# Altium PCB LoRa-Alarm.PcbDoc
Units mil, origin at the board's own origin, x right, y up, seen from the top; angles counter-clockwise.
Board outline 2372.23 x 1430.02 mil, 2 copper layers (Top Layer, Bottom Layer); 52 components, 40 nets, 227 pads, 37 vias.
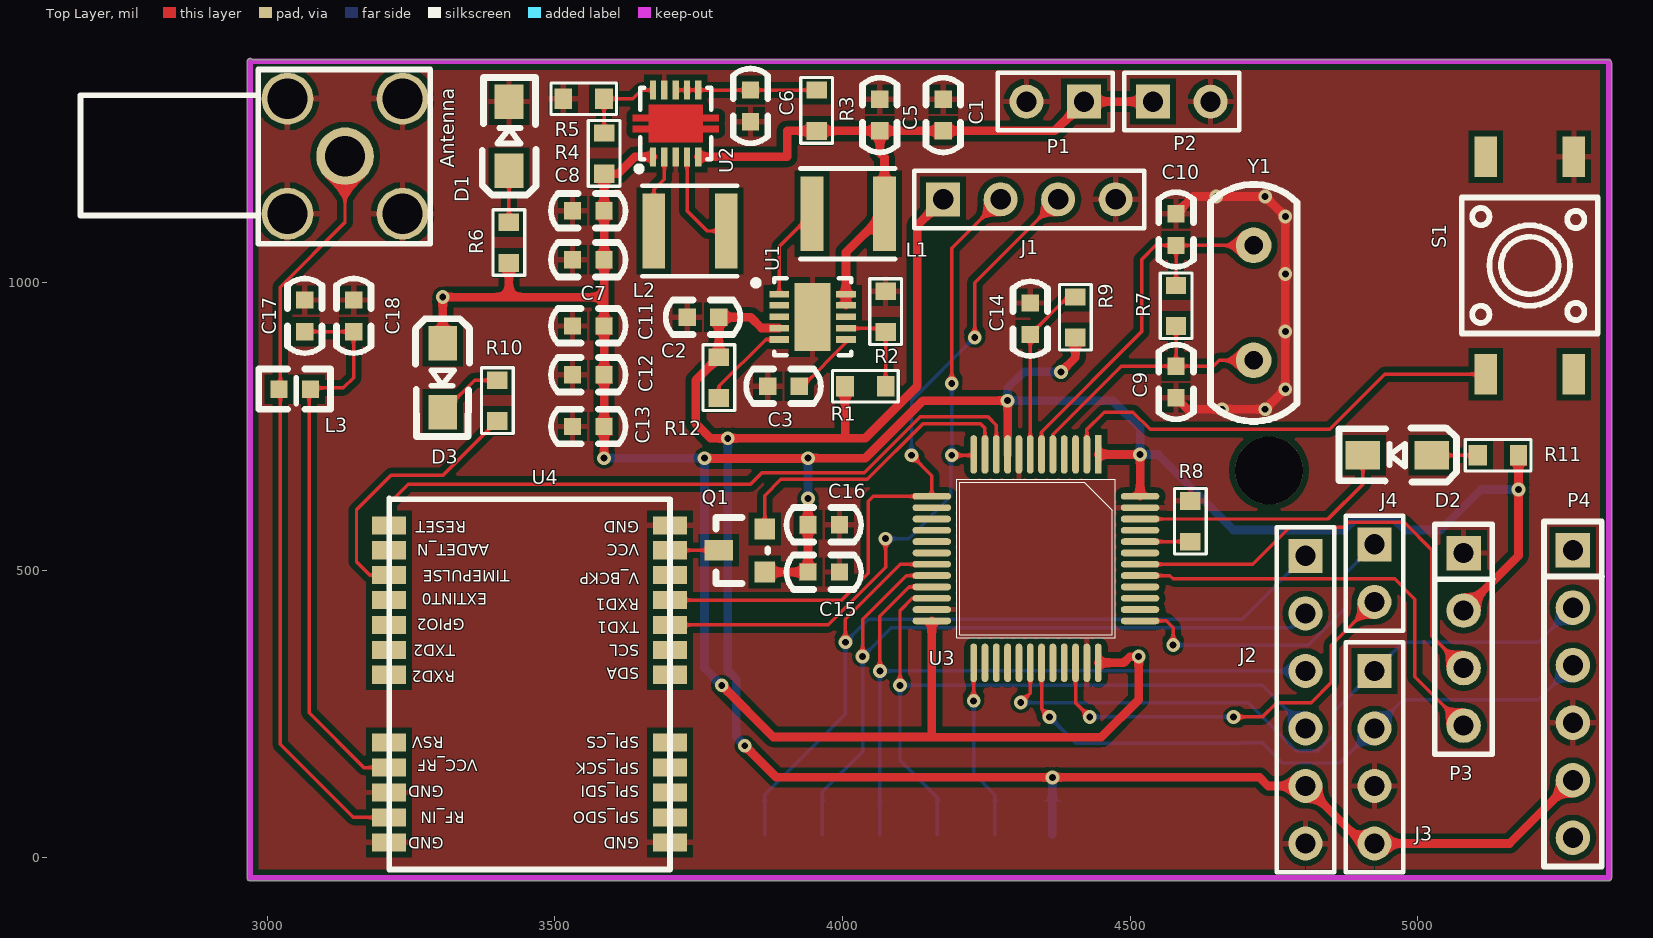
[diagram p0: Top Layer view]
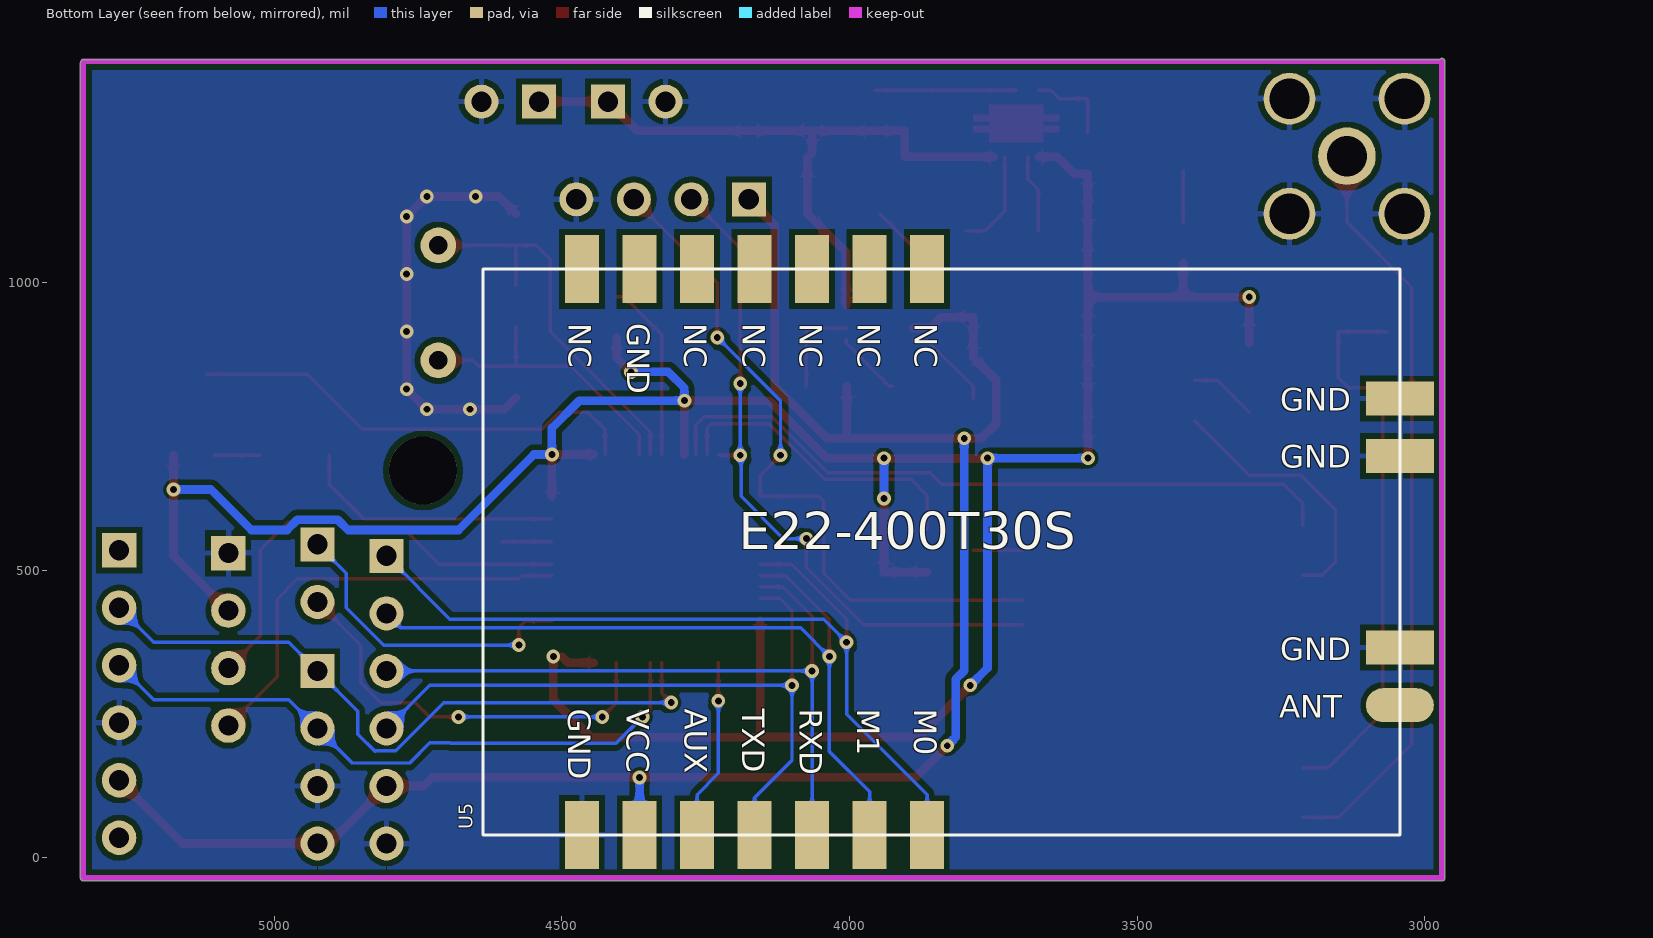
[diagram p1: Bottom Layer view, seen from below]

## Layer stack, top to bottom
Top Solder: solder mask 0.4, Solder Resist, Dk 3.5
Top Layer: signal copper 1.4
Dielectric 1: dielectric 12.6, FR-4, Dk 4.8
Bottom Layer: signal copper 1.4
Bottom Solder: solder mask 0.4, Solder Resist, Dk 3.5

## Board outline
2970,-40.01 cw(c2970,-35) 2964.99,-35 2964.99,1385 cw(c2970,1385) 2974.44,1387.34 5332.2,1387.34 cw(c5332.2,1382.32) 5337.22,1382.32 5337.22,-35 cw(c5332.2,-35) 5332.2,-40.01

## Design rules (kind name [scope] priority, off if disabled: settings)
Clearance clearance [IsVia vs InPolygon] p1: gap=6
Clearance poly [InPolygon] p2: gap=10
Clearance all [All] p3: gap=6
MinimumSolderMaskSliver [All] p1: minsoldermaskwidth=2
PolygonConnect PolygonConnect_1 [IsVia] p1: connectstyle=Direct reliefconductorwidth=10 reliefentries=4 polygonreliefangle="90 Angle" airgapwidth=10
PolygonConnect [All] p2: connectstyle=Relief reliefconductorwidth=10 reliefentries=4 polygonreliefangle="90 Angle" airgapwidth=10
RoutingVias [All] p1: holewidth=12 width=24 viastyle="Through Hole" minholewidth=12 minwidth=24 maxholewidth=12 maxwidth=24
SilkToSilkClearance [All] p1: silktosilkclearance=2
SilkToSolderMaskClearance [IsPad] p1: minsilkscreentomaskgap=2 clearancetoexposedcopper=TRUE
SolderMaskExpansion [All] p1: expansion=2.5
Width Width_1 [InNetClass('PWR')] p1: maxlimit=60 minlimit=8 preferedwidth=15
Width [All] p2: maxlimit=6 minlimit=6 preferedwidth=6
27 further rules are at their usual default settings.

## Classes and differential pairs
component class LoRa-Alarm: ANTENNA
net class PWR: +3.3V +3.7V +5V GND

## Components (designator, comment, footprint, x,y, rotation, side; value= is the part's Value field where it differs from the comment)
Antenna "Active antenna" SMA-W 3135,1220 r0 top (schematic designator ANTENNA)
C1 "Cap1" 0603C 4175,1314.13 r270 top
C2 "Cap2" 0603C 3735,940 r0 top
C3 "Cap3" 0603C 3875,820 r0 top
C5 "Cap5" 0603C 4065,1314.13 r270 top
C6 "Cap6" 0603C 3840,1285 r90 top
C7 "Cap7" 0603C 3535.43,1040 r0 top
C8 "Cap8" 0603C 3535.43,1125 r0 top
C9 "Cap9" 0603C 4580,850 r270 top
C10 "Cap10" 0603C 4580,1070 r90 top
C11 "Cap11" 0603C 3580.43,925 r180 top
C12 "Cap12" 0603C 3580.43,840 r180 top
C13 "Cap13" 0603C 3580.43,750 r180 top
C14 "Cap14" 0603C 4326.5,915 r90 top
C15 "Cap15" 0603C 3945,496.92 r0 top
C16 "Cap16" 0603C 3945,579.04 r0 top
C17 "Cap17" 0603C 3065,920 r90 top
C18 "Cap18" 0603C 3150,920 r90 top
D1 "LED1" 贴片二极管 3420,1315 r270 top
D2 "LED2" 贴片二极管 4905,700 r0 top
D3 "LED3" 贴片二极管 3305,775 r90 top
J1 "GPS" HDR1X4 4175,1145 r0 top
J2 "Lora" HDR1X6 4805,525 r270 top
J3 "Bluetooth" HDR1X4 4925,325 r270 top
J4 "JTAG" HDR1X2 4925,545 r270 top
L1 "Inductor1" IND-SMD_L4.0-W4.0_SMNR4020 4010,1120 r180 top
L2 "Inductor2" IND-SMD_L4.0-W4.0_SMNR4020 3735,1090 r180 top
L3 "Inductor3" 0603L 3070,815 r180 top
P1 "Header 2" HDR1X2 4420,1315 r180 top
P2 "Header 2" HDR1X2 4540,1315 r0 top
P3 "OLED" SIP4 5080,530 r270 top
P4 "Bluetooth" SIP6 5270,535 r270 top
Q1 "SI2302" SOT-23 3865,496.92 r90 top
R1 "Res1" 0603R 4040,820 r180 top
R2 "Res2" 0603R 4075,950 r270 top
R3 "Res3" 0603R 3955,1299.57 r270 top
R4 "Res4" 0603R 3585.43,1225 r270 top
R5 "Res5" 0603R 3550,1320 r0 top
R6 "Res6" 0603R 3420,1070 r270 top
R7 "Res7" 0603R 4580,960 r270 top
R8 "Res8" 0603R 4605,585.32 r90 top
R9 "Res9" 0603R 4405,940 r270 top
R10 "Res10" 0603R 3400,795 r270 top
R11 "Res11" 0603R 5140,700 r180 top
R12 "Res12" 0603R 3785,835 r270 top
S1 "按键" KEY-SMD_4P-L6.0-W6.0-P3.90-LS10.0 5195,1030 r90 top
U1 "TPS61230" VSON-10_L3.0-W3.0-P0.50-BL-EP 3947.97,940.62 r270 top
U2 "TPS63000" SON-10_L3.1-W3.1-P0.50-BL-EP 3710,1276.93 r0 top
U3 "STM32L151" TQFP48 4335,525 r270 top
U4 "UM220-III N" "UM220-III N" 3211.81,625.47 r180 top
U5 "E22-400T30S" PE32(915T30S) 3865,40 r180 bottom
Y1 "8MHz" XTAL 4715,1070 r270 top

## Footprints (in the part's own frame and the unit in brackets; to place one, negate y for a bottom-side part, rotate by r counter-clockwise, add the part's x,y. Pads: shape width x height; smd on the part's side, far side on the other; paste and mask are expansions set on the pad)
0603C [mil]
  rect 30x30 smd: 1(-5,0) 2(50,0)
  silkscreen extent -42,-30 87,30
0603L [mil]
  rect 30x30 smd: 1(-5,0) 2(50,0)
  silkscreen extent -40,-35 85,35
0603R [mm]
  rect 0.762x0.9 smd: 1(-0.9,0)
  rect 0.8x0.9 smd: 2(0.9,0)
  silkscreen extent -1.45,-0.7 1.45,0.7, body extent -0.85,-0.4 0.85,0.4, height 0.56
HDR1X2 [mm] "Connector; Header; 2 Position"
  rect 1.5x1.5 hole 0.9: 1(0,0)
  round 1.5 hole 0.9: 2(2.54,0)
  silkscreen extent -1.27,-1.27 3.81,1.27
HDR1X4 [mm] "Connector; Header; 4 Position"
  rect 1.5x1.5 hole 0.9: 1(0,0)
  round 1.5 hole 0.9: 2(2.54,0) 3(5.08,0) 4(7.62,0)
  silkscreen extent -1.27,-1.27 8.89,1.27
HDR1X6 [mm] "Connector; Header; 6 Position"
  rect 1.5x1.5 hole 0.9: 1(0,0)
  round 1.5 hole 0.9: 2(2.54,0) 3(5.08,0) 4(7.62,0) 5(10.16,0) 6(12.7,0)
  silkscreen extent -1.27,-1.27 13.97,1.27
IND-SMD_L4.0-W4.0_SMNR4020 [mm]
  rect 1x3.3 smd: 1(-1.6,0) 2(1.6,0)
  silkscreen extent -2.08,-2 2.12,2
KEY-SMD_4P-L6.0-W6.0-P3.90-LS10.0 [mm]
  rect 1.8x1 smd: 1(-4.8,1.95) 2(4.8,1.95) 3(-4.8,-1.95) 4(4.8,-1.95)
  silkscreen extent -3,-3 3,3
PE32(915T30S) [mm] "40.5mm*25mm*3.80mm-S"
  rect 1.5x3 smd: 1(0,0) 2(-2.54,0) 3(-5.08,0) 4(-7.62,0) 5(-10.16,0) 6(-12.7,0) 7(-15.24,0) 8(-15.24,25) 9(-12.7,25) 10(-10.16,25) 11(-7.62,25) 12(-5.08,25) 13(-2.54,25) 14(0,25)
  rect 3x1.5 smd: 15(20.88,19.27) 16(20.88,16.73) 17(20.88,8.27)
  oval 3x1.5 smd: 18(20.88,5.73)
  silkscreen extent -19.62,0 20.88,25
SIP4 [mil]
  rect 60x60 hole 35: 1(0,0)
  round 60 hole 35: 2(100,0) 3(200,0) 4(300,0)
  silkscreen extent -50,-50 350,51
SIP6 [mil]
  rect 60x60 hole 35: 1(0,0)
  round 60 hole 35: 2(100,0) 3(200,0) 4(300,0) 5(400,0) 6(500,0)
  silkscreen extent -50,-50 550,51
SMA-W [mil]
  round 100 hole 70: 1(0,0)
  round 90 hole 70: 2(-100,-100) 2(-100,100) 2(100,-100) 2(100,100)
  silkscreen extent -460,-152 148,151, body extent -460,-140 135,136, height 108
SON-10_L3.1-W3.1-P0.50-BL-EP [mm]
  rect 0.28x0.85 smd: 1(-1,-1.475) 2(-0.5,-1.475) 3(0,-1.475) 4(0.5,-1.475) 5(1,-1.475) 6(1,1.475) 7(0.5,1.475) 8(0,1.475) 9(-0.5,1.475) 10(-1,1.475)
  round 0 smd: 11(0,0)
  Top Layer region: 1.199,0.826 1.199,0.39 1.9,0.39 1.9,0.11 1.199,0.11 1.199,-0.11 1.9,-0.11 1.9,-0.39 1.199,-0.39 1.199,-0.826 -1.199,-0.826 -1.199,-0.39 -1.9,-0.39 -1.9,-0.11 -1.199,-0.11 -1.199,0.11 -1.9,0.11 -1.9,0.39 -1.199,0.39 -1.199,0.826
  silkscreen extent -1.74,-2.12 1.58,1.58
SOT-23 [mil]
  rect 36x36 smd: 1(0,0) 2(75,0)
  rect 36x50 smd: 3(38,80)
  silkscreen extent -20,-5 95,85
TQFP48 [mm]
  rect 1.7x0.3 smd: 1(-4.482,2.784)
  oval 1.7x0.3 smd: 2(-4.482,2.284) 3(-4.482,1.784) 4(-4.482,1.284) 5(-4.482,0.784) 6(-4.482,0.284) 7(-4.482,-0.216) 8(-4.482,-0.716) 9(-4.482,-1.216) 10(-4.482,-1.716) 11(-4.482,-2.216) 12(-4.482,-2.716) 25(4.718,-2.716) 26(4.718,-2.216) 27(4.718,-1.716) 28(4.718,-1.216) 29(4.718,-0.716) 30(4.718,-0.216) 31(4.718,0.284) 32(4.718,0.784) 33(4.718,1.284) 34(4.718,1.784) 35(4.718,2.284) 36(4.718,2.784)
  oval 0.3x1.7 smd: 13(-2.632,-4.566) 14(-2.132,-4.566) 15(-1.632,-4.566) 16(-1.132,-4.566) 17(-0.632,-4.566) 18(-0.132,-4.566) 19(0.368,-4.566) 20(0.868,-4.566) 21(1.368,-4.566) 22(1.868,-4.566) 23(2.368,-4.566) 24(2.868,-4.566) 37(2.868,4.634) 38(2.368,4.634) 39(1.868,4.634) 40(1.368,4.634) 41(0.868,4.634) 42(0.368,4.634) 43(-0.132,4.634) 44(-0.632,4.634) 45(-1.132,4.634) 46(-1.632,4.634) 47(-2.132,4.634) 48(-2.632,4.634)
  silkscreen extent -3.38,-3.47 3.62,3.53
"UM220-III N" [mm]
  rect 1.5x0.8 smd: 1(0,1.2) 2(0,2.3) 3(0,3.4) 4(0,4.5) 5(0,5.6) 6(0,6.7) 7(0,7.8) 8(0,10.8) 9(0,11.9) 10(0,13) 11(0,14.1) 12(0,15.2) 13(-12.4,15.2) 14(-12.4,14.1) 15(-12.4,13) 16(-12.4,11.9) 17(-12.4,10.8) 18(-12.4,7.8) 19(-12.4,6.7) 20(-12.4,5.6) 21(-12.4,4.5) 22(-12.4,3.4) 23(-12.4,2.3) 24(-12.4,1.2)
  silkscreen extent -12.4,0 0,16.4
VSON-10_L3.0-W3.0-P0.50-BL-EP [mil]
  rect 11.5x34.5 smd: 1(-39.37,-57.97) 2(-20.06,-58.02) 3(-0.06,-58.02) 4(19.94,-58.02) 5(39.36,-57.97) 6(39.36,58.03) 7(19.94,57.98) 8(-0.06,57.98) 9(-20.06,57.98) 10(-39.38,58.03)
  rect 118.11x62.99 smd: 11(-0.06,-0.02)
  silkscreen extent -67,-103 67,67
XTAL [mil]
  round 62 hole 32: 1(5,0) 2(205,0)
  silkscreen extent -101,-75 311,75
贴片二极管 [mil]
  rect 60x50 smd: 1(120,0) 2(0,0)
  silkscreen extent -42,-46 162,47

## Part data
C1 C2 C3 C5 C6 C7 C8 C9 C10 C11 C12 C13 C14 C15 C16 C17 C18: library part Cap, "Capacitor"
D1: "Typical RED GaAs LED"
D2 D3: library part LED1, "Typical RED GaAs LED"
J1 J3: library part "Header 4", "Header, 4-Pin"
J2: library part "Header 6", "Header, 6-Pin"
J4: library part "Header 2", "Header, 2-Pin"
L1 L2 L3: library part Inductor, "Inductor"
P1 P2: "Header, 2-Pin"
Q1: library part MOSFET-N, "N-Channel MOSFET"
R1 R3 R4 R5 R6 R7 R8 R9 R10 R11 R12: library part Res2, "Resistor"
R2: "Resistor"
Y1: library part XTAL, "Crystal Oscillator"

## Free pads (board coordinates)
  round 118.11 hole 118.11 unplated: 1(4741.65,673.66)

## Via types
v1: diameter 24, hole 12, Top Layer to Bottom Layer, 37 vias

## Nets (pads, with @x,y where several pads share a name; then routed paths per layer and width w, separated by ;. In a path a pad name is that pad's centre, name@x,y a point inside that pad or via, vN(x,y) a via of type N, cw(c..) or ccw(c..) an arc to the next point about the centre after c; other vN are vias at no path point)
+3.3V: C7.2 C8.2 C11.1 C12.1 C13.1 C15.1 C16.1 D3.1 P3.2 Q1.1 R4.2 R6.2 R9.2 R11.1 U2.1 U3.1 U3.9 U3.24 U3.36 U3.48 | length 5374.7
  Top Layer w15: D3.1 v1(3305,975) 3420,975 ; R6.2 3420,975 ; v1(3585.43,695) C13.1 C12.1 C11.1 3585.43,975 ; U2.1 3638.86,1218.86 3609.57,1189.57 R4.2 C8.2 C7.2 3585.43,975 ; v1(3760,695) 3760.5,694.5 3939.5,694.5 v1(3940,695) 4039.69,695 4139.69,795 v1(4287.13,795) U3.9 ; v1(3790,300) 3879.76,210.24 4155.24,210.24 ; Q1.1 C15.1 C16.1 v1(3940,625) ; U3.24 4155.24,210.24 ; v1(4380,845) 4405,870 R9.2 ; U3.36 4489.25,339.25 4500,350 v1(4515,350) 4515,275 4450,210 4155.47,210 4155.24,210.24 ; U3.1 v1(4517.44,701.46) U3.48 ; P3.2 5175.43,525.43 v1(5175.43,640.43) R11.1 ; 3420,975 3585.43,975
  Bottom Layer w15: v1(3585.43,695) v1(3760,695) 3760,330 v1(3790,300) ; v1(3940,625) v1(3940,695) ; v1(4380,845) 4315,845 4287.13,817.13 v1(4287.13,795) 4470,795 4517.44,747.56 v1(4517.44,701.46) 4548.54,701.46 4680,570 4871.85,570 4889.88,588.03 4960.12,588.03 4978.15,570 5040,570 5110.43,640.43 v1(5175.43,640.43)
+3.7V: C1.2 C5.2 L1.1 P1.1 P2.1 R3.2 U1.9 U1.10 U2.5 | length 1191.5
  Top Layer w15: U2.5 3903.86,1218.86 3903.86,1264.13 R3.2 C5.2 ; U1.9 U1.10 U1.10 4006,1053.01 L1.1 4072.99,1217.99 4065,1225.98 C5.2 ; P2.1 P1.1 4369.13,1264.13 C1.2 C5.2
+5V: C2.2 J1.1 J2.5 J3.4 P4.5 R1.2 R12.1 U1.4 U5.6 | length 3384.6
  Top Layer w15: v1(3830,195) 3885,140 v1(4365,140) 4725,140 4740,125 J2.5 4905,25 J3.4 5160,25 P4.5 ; U1.4 3889.2,921.43 3859.2,921.43 3840.63,940 C2.2 R12.1 3745,830.43 3745,755 3770.5,729.5 v1(3800.5,729.5) 4005,729.5 ; R1.2 4004.57,729.93 4005,729.5 ; J1.1 4130,1100 4130,820 4039.5,729.5 4005,729.5
  Bottom Layer w15: v1(3800.5,729.5) 3800.5,325.56 3815.5,310.56 3815.5,209.5 v1(3830,195) ; U5.6 v1(4365,140)
AUX: U3.25 U5.5 | length 314.5
  Top Layer w6: v1(4228.07,273.07) U3.25
  Bottom Layer w6: v1(4228.07,273.07) 4228.07,146.93 4265,110 U5.5
GND: Antenna.2 C1.1 C2.1 C3.1 C5.1 C6.1 C7.1 C8.1 C9.2 C10.2 C11.2 C12.2 C13.2 C14.2 C15.2 C16.2 C17.2 C18.2 D1.2 J1.4 J2.6 J3.3 P1.2 P2.2 P3.1 P4.4 R2.1 R5.1 R8.2 S1.4 U1.11 U2.3 U2.9 U3.8 U3.23 U3.35 U3.47 U4.10 U4.12 U4.13 U4.24 U5.7 U5.15 U5.16 U5.17 | length 729.7
  Top Layer w15: C9.2 4600,780 v1(4660,780) v1(4735,780) v1(4770,815) v1(4770,915) v1(4770,1015) v1(4770,1115) v1(4735,1150) v1(4650,1150) 4610,1150 C10.2
GPS_EN: Q1.2 U3.11 | length 541.6
  Top Layer w6: Q1.2 3865,630 3893,658 4043,658 4140,755 4240,755 4247.76,747.24 U3.11
GPS_TIME: R10.2 U4.3 | length 465.5
  Top Layer w6: U4.3 3178.39,491.61 3155,515 3155,605 3215,665 3305.43,665 R10.2
KEY: S1.1 U3.2 | length 801.4
  Top Layer w6: U3.2 4424.92,744.92 4455,775 4505,775 4535,745 4847.2,745 4943.22,841.02 S1.1
LED: D2.2 U3.46 | length 462.7
  Top Layer w6: U3.46 4844.25,589.25 4905,650 D2.2
M0: J2.1 U3.19 U5.1 | length 1484.9
  Top Layer w6: v1(4005,375) 4005,415 4100.51,510.51 U3.19
  Bottom Layer w6: U5.1 3865,110 4005,250 v1(4005,375) 4045,415 4695,415 J2.1
M1: J2.2 U3.20 U5.2 | length 1356.7
  Top Layer w6: v1(4035,350) 4035,415 4110.83,490.83 U3.20
  Bottom Layer w6: U5.2 3965,115 4035,185 v1(4035,350) 4085,400 4780,400 J2.2
NetANTENNA_1: Antenna.1 L3.2 U4.11 | length 1311.1
  Top Layer w6: Antenna.1 3135,1105 3022.48,992.48 3022.48,197.52 3149.65,70.35 U4.11
NetC3_2: C3.2 U1.6 | length 118.1
  Top Layer w6: C3.2 3930.55,820 4006,895.45 U1.6
NetC6_2: C6.2 R3.1 U2.6 U2.7 U2.8 | length 245
  Top Layer w6: U2.8 U2.7 U2.6 C6.2 R3.1
NetC17_1: C17.1 C18.1 L3.1 U4.9 | length 993.5
  Top Layer w6: C17.1 C18.1 3150,835 3132.17,817.17 3072.48,817.17 3072.48,252.52 3168.03,156.97 U4.9
NetD1_1: D1.1 R6.1 | length 89.6
  Top Layer w6: R6.1 D1.1
NetD2_1: D2.1 R11.2 | length 79.6
  Top Layer w6: D2.1 R11.2
NetD3_2: D3.2 R10.1 | length 118
  Top Layer w6: D3.2 3360.43,830.43 R10.1
NetL1_2: L1.2 U1.1 | length 163.6
  Top Layer w6: U1.1 3890,1062.99 L1.2
NetL2_1: L2.1 U2.4 | length 176.5
  Top Layer w6: U2.4 3729.7,1125.3 3765,1090 L2.1
NetL2_2: L2.2 U2.2 | length 136.4
  Top Layer w6: L2.2 3672.01,1162.01 3690.3,1180.3 U2.2
NetR1_1: R1.1 R2.2 U1.7 | length 166.3
  Top Layer w6: U1.7 4068.89,920.68 R2.2 4075,820.43 R1.1
NetR4_1: R4.1 R5.2 U2.10 | length 151
  Top Layer w6: R4.1 R5.2 3635,1320 3650,1335 U2.10
NetR8_1: R8.1 U3.44 | length 87.6
  Top Layer w6: U3.44 R8.1
NetR12_2: R12.2 U1.5 | length 158.9
  Top Layer w6: R12.2 3785,819.72 3866.54,901.26 U1.5
NRST: C14.1 R9.1 U3.7 | length 314.2
  Top Layer w6: U3.7 C14.1 4391.93,975.43 R9.1
PD0: C9.1 R7.2 U3.5 Y1.2 | length 506.6
  Top Layer w6: U3.5 4365.87,735.87 4485,855 C9.1 ; R7.2 C9.1 ; Y1.2 4655,865 4645,855 C9.1
PD1: C10.1 R7.1 U3.6 Y1.1 | length 685.5
  Top Layer w6: U3.6 4346.18,741.18 4520,915 4520,1040 4545,1065 C10.1 ; R7.1 C10.1 ; Y1.1 C10.1
RST: U3.10 U4.1 | length 1213.5
  Top Layer w6: U4.1 3211.81,616.81 3245,650 3840,650 3860,670 4038.03,670 4135.03,767 4253,767 4267.44,752.56 U3.10
RXD1: J3.2 P4.3 U3.31 | length 1114.4
  Top Layer w6: U3.31 4346.18,258.82 v1(4360,245)
  Bottom Layer w6: v1(4360,245) 4406,199 4693.7,199 4694.7,200 4730,200 4765,165 4865,165 J3.2 4975,275 5210,275 P4.3
RXD2: J2.4 U3.22 U5.4 | length 1217.1
  Top Layer w6: v1(4100,300) 4100,430 4121.46,451.46 U3.22
  Bottom Layer w6: U5.4 4165,105 4100,170 v1(4100,300) 4730,300 J2.4
RXD3: J1.3 U3.13 U4.21 | length 1239.7
  Top Layer w6: U4.21 3998.31,448.31 4045,495 4045,620 4053.62,628.62 U3.13 4155.24,664.76 v1(4120,700) ; v1(4230,905) 4230,1000 J1.3
  Bottom Layer w6: v1(4120,700) 4120,795 v1(4230,905)
SCL: P3.3 U3.42 | length 785.7
  Top Layer w6: U3.42 4713.46,510.51 4777.94,575 4871.47,575 4880,583.53 4976.47,583.53 5025,535 5025,385 P3.3
SDA: P3.4 U3.41 | length 749.7
  Top Layer w6: U3.41 4569.17,490.83 4575,485 4960,485 4995,450 4995,315 P3.4
SWCLK: J4.1 U3.37 | length 550.2
  Top Layer w6: U3.37 4562.91,412.09 4575,400 v1(4575,370)
  Bottom Layer w6: v1(4575,370) 4810,370 4875,435 4875,495 J4.1
SWDIO: J4.2 U3.34 | length 720.4
  Top Layer w6: U3.34 4405.24,269.76 v1(4430,245) ; v1(4680,245) 4730,245 4755,270 4815,270 4850,305 4850,370 J4.2
  Bottom Layer w6: v1(4430,245) v1(4680,245)
TXD1: J3.1 P4.2 U3.30 | length 1198.3
  Top Layer w6: v1(4310,270) 4326.5,286.5 U3.30
  Bottom Layer w6: v1(4310,270) 4705.51,270 4789.04,186.47 4823.53,186.47 4825,185 4855,215 4855,255 J3.1 4975,375 5210,375 P4.2
TXD2: J2.3 U3.21 U5.3 | length 1231.4
  Top Layer w6: v1(4065,325) 4065,420 4116.14,471.14 U3.21
  Bottom Layer w6: U5.3 v1(4065,325) J2.3
TXD3: J1.2 U3.12 U4.20 | length 1204.3
  Top Layer w6: U4.20 3975,405 4075,505 v1(4075,555) ; v1(4190,700) 4226.61,700 U3.12 ; v1(4190,825) 4190,1060 J1.2
  Bottom Layer w6: v1(4075,555) 4115,555 4188.54,628.54 4188.54,701.46 v1(4190,700) v1(4190,825)
VCC_3: Q1.3 U4.23 | length 85
  Top Layer w6: U4.23 Q1.3
pads on no net: P4.1 P4.6 S1.2 S1.3 U1.2 U1.3 U1.8 U2.11 U3.3 U3.4 U3.14 U3.15 U3.16 U3.17 U3.18 U3.26 U3.27 U3.28 U3.29 U3.32 U3.33 U3.38 U3.39 U3.40 U3.43 U3.45 U4.2 U4.4 U4.5 U4.6 U4.7 U4.8 U4.14 U4.15 U4.16 U4.17 U4.18 U4.19 U4.22 U5.8 U5.9 U5.10 U5.11 U5.12 U5.13 U5.14 U5.18

## Polygon pours and split planes (outlines as drawn)
GND on Top Layer "TOP-No Net" (solid, remove dead copper, pour order 8): 2955,1405 2960,1400 5360,1400 5360,-85 5365,-90 5325,-50 2950,-50
GND on Bottom Layer "TOP-No Net" (solid, remove dead copper, pour order 10): 2970,1420 2950,1400 2950,-50 5350,-50 5360,-60 5360,1405 5365,1410

## Keep-outs
Keep-Out Layer:
  lines w10: 2970,-35 5332.2,-35 5332.2,1385 2970,1385 2970,-35

## Text inside footprints (layer, text, board x,y; h text height)
U4: Top Overlay "GND" at 3646.81,585.47 h19.68 r180; Top Overlay "VCC" at 3646.81,545.47 h19.68 r180; Top Overlay "V_BCKP" at 3646.81,495.47 h19.68 r180; Top Overlay "RXD1" at 3646.81,450.47 h19.68 r180; Top Overlay "TXD1" at 3646.81,410.47 h19.68 r180; Top Overlay "SCL" at 3646.81,370.47 h19.68 r180; Top Overlay "SDA" at 3646.81,330.47 h19.68 r180; Top Overlay "SPI_CS" at 3646.81,210.47 h19.68 r180; Top Overlay "SPI_SCK" at 3646.81,165.47 h19.68 r180; Top Overlay "SPI_SDI" at 3646.81,125.47 h19.68 r180; Top Overlay "SPI_SDO" at 3646.81,80.47 h19.68 r180; Top Overlay "GND" at 3646.81,35.47 h19.68 r180; Top Overlay "GND" at 3306.81,35.47 h19.68 r180; Top Overlay "RF_IN" at 3342.89,80.47 h19.68 r180; Top Overlay "GND" at 3306.81,125.47 h19.68 r180; Top Overlay "VCC_RF" at 3365.85,170.47 h19.68 r180; Top Overlay "RSV" at 3306.81,210.47 h19.68 r180; Top Overlay "RXD2" at 3326.49,325.47 h19.68 r180; Top Overlay "TXD2" at 3326.49,370.47 h19.68 r180; Top Overlay "GPIO2" at 3342.89,415.47 h19.68 r180; Top Overlay "EXTINT0" at 3382.25,460.47 h19.68 r180; Top Overlay "TIMEPULSE" at 3421.6,500.47 h19.68 r180; Top Overlay "AADET_N" at 3385.53,545.47 h19.68 r180; Top Overlay "RESET" at 3346.17,585.47 h19.68 r180
U5: Bottom Overlay "NC" at 4287.44,930 h39.37 r90; Bottom Overlay "GND" at 3250.75,777.4 h39.37; Bottom Overlay "GND" at 3250.75,678.58 h39.37; Bottom Overlay "NC" at 3886.93,929.45 h39.37 r90; Bottom Overlay "NC" at 3985.75,929.45 h39.37 r90; Bottom Overlay "NC" at 4086.14,929.45 h39.37 r90; Bottom Overlay "NC" at 4185.75,929.45 h39.37 r90; Bottom Overlay "GND" at 4386.14,929.45 h39.37 r90; Bottom Overlay "NC" at 4488.11,929.45 h39.37 r90; Bottom Overlay "GND" at 4488.9,259.49 h39.37 r90; Bottom Overlay "VCC" at 4386.93,259.49 h39.37 r90; Bottom Overlay "AUX" at 4286.54,259.49 h39.37 r90; Bottom Overlay "TXD" at 4186.54,259.49 h39.37 r90; Bottom Overlay "RXD" at 4086.93,259.49 h39.37 r90; Bottom Overlay "M1" at 3986.54,259.49 h39.37 r90; Bottom Overlay "M0" at 3887.72,259.49 h39.37 r90; Bottom Overlay "ANT" at 3252.62,243.54 h39.37; Bottom Overlay "GND" at 3250.75,343.94 h39.37